# Allegro board AVRUSB500.brd
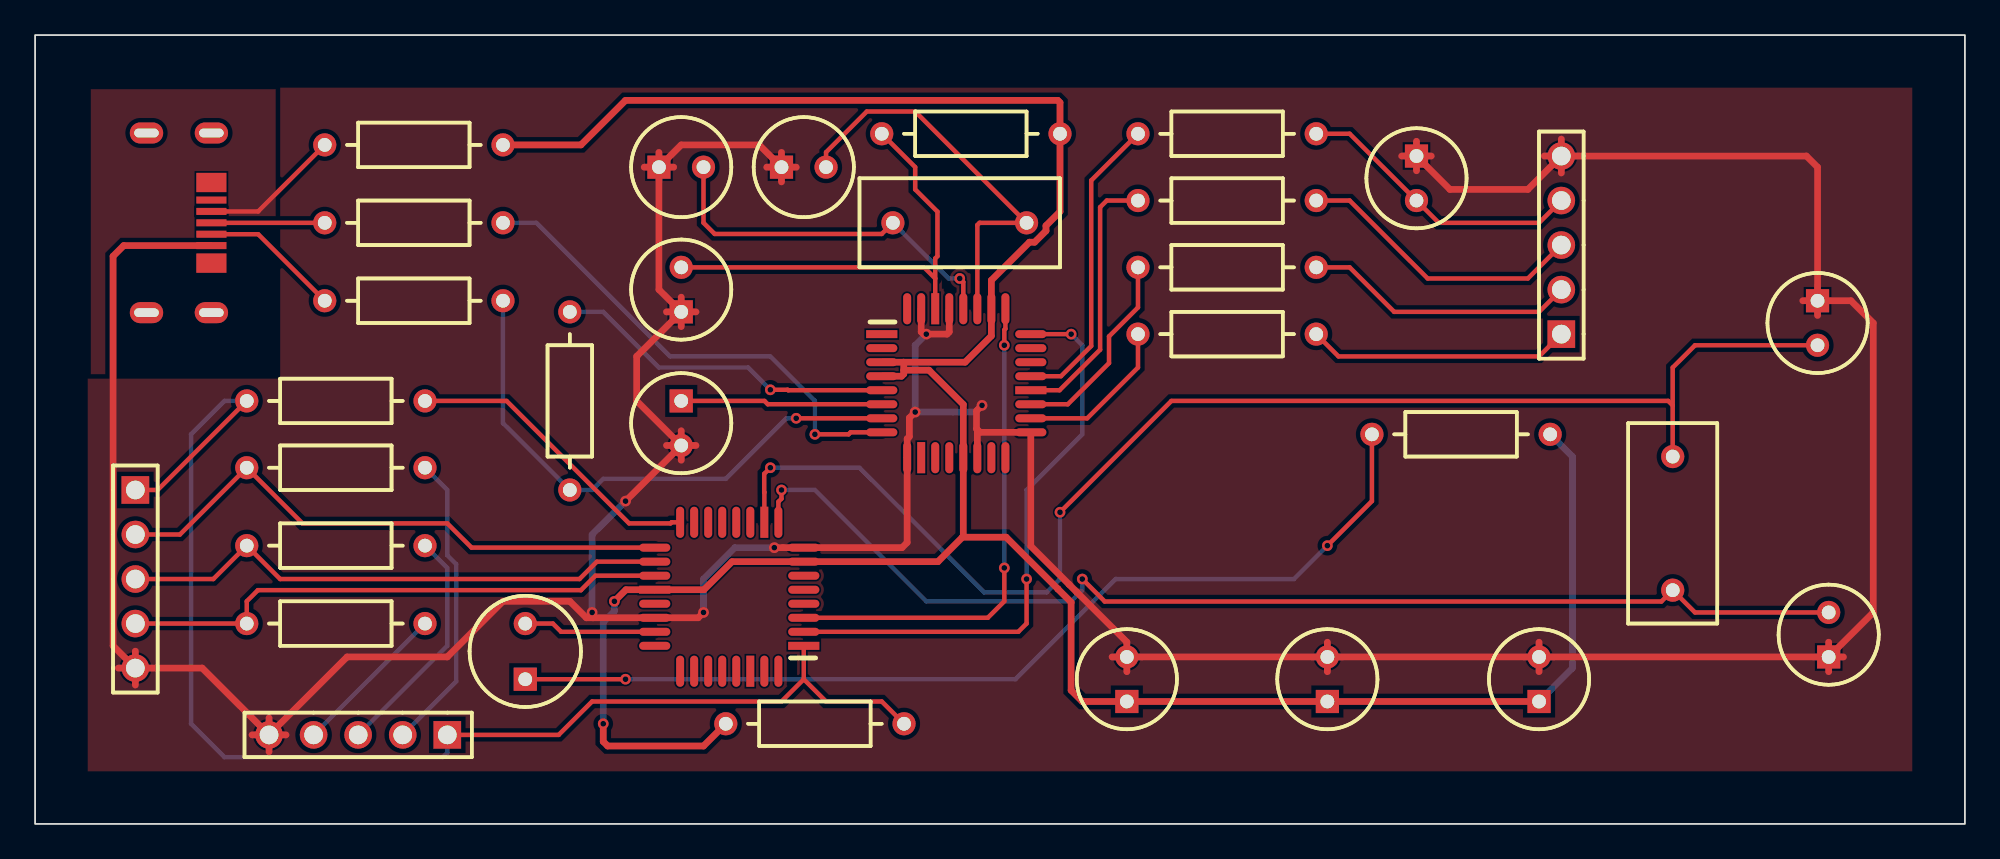
[diagram p0: board, top side]
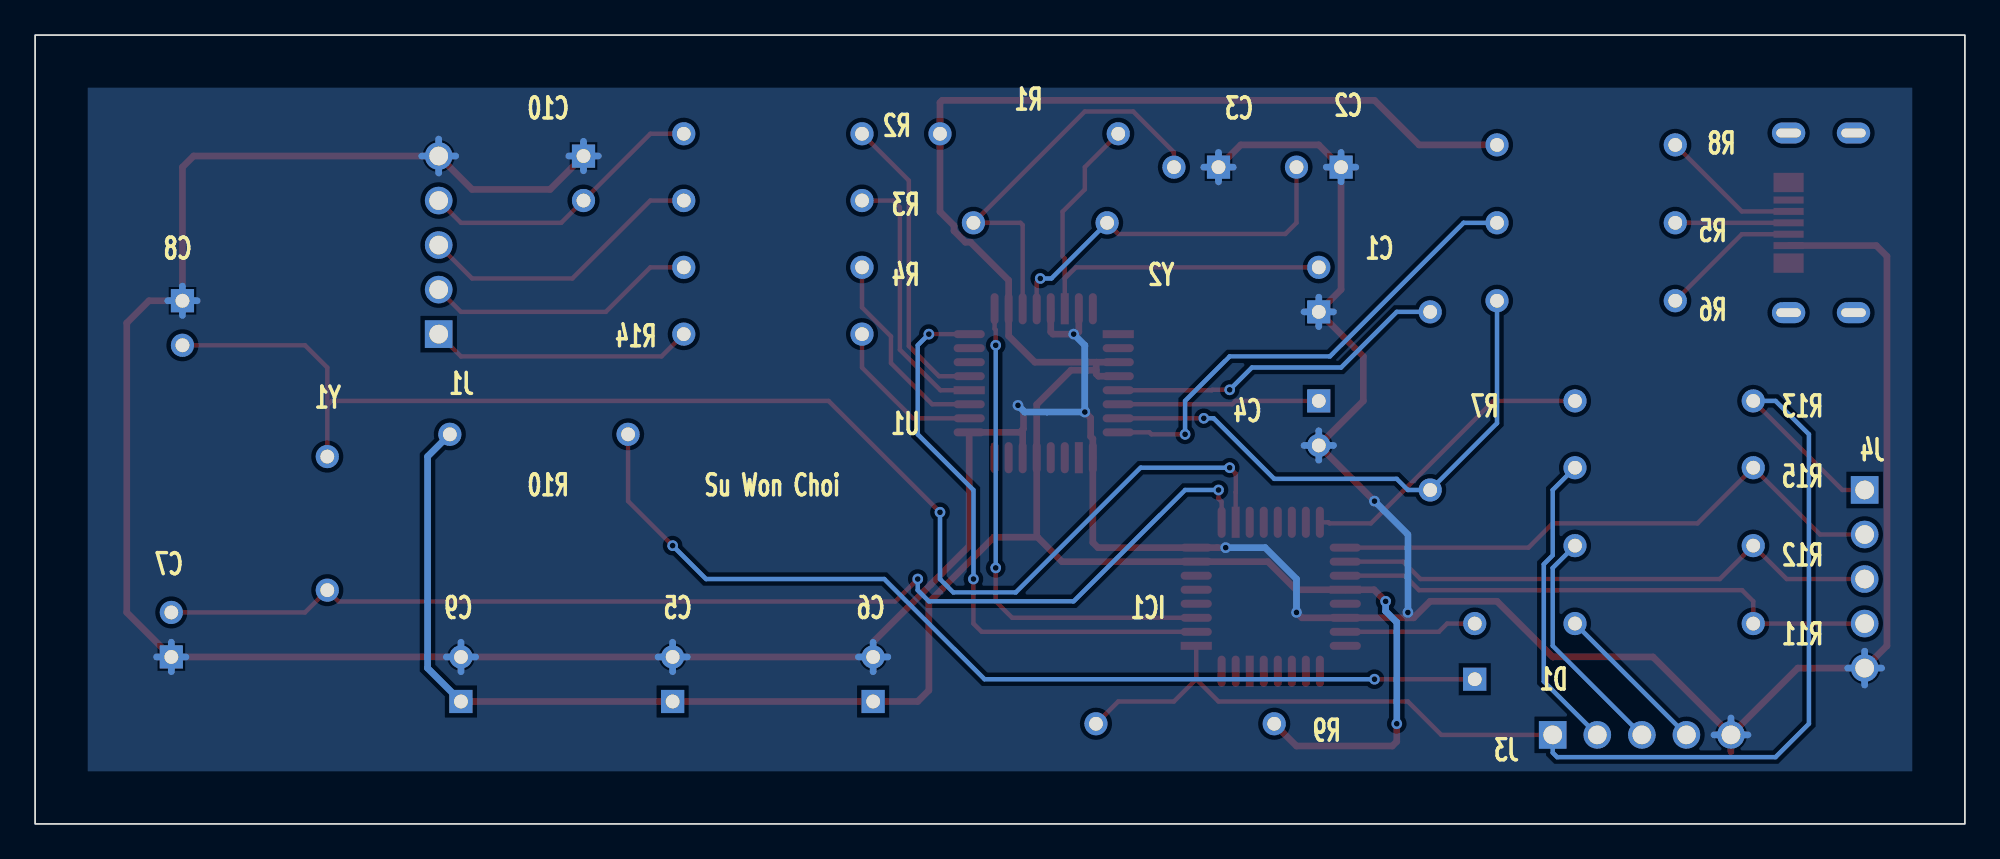
[diagram p1: board, bottom side, seen from below]

Outline 110 x 45 mm; copper layers: TOP, BOTTOM. Coordinates in mm from the lower left corner of the outline.
Outline path: rectangle 0,0 110,45

## Design rules (mm)
net group POWERNETS: nets GND VCC

## Placement (name value [footprint] x y rotation side)
C1  47nF  [CPCYL1D225LS100031]  36.83 29.21 90 top
C2  27pF  [CPCYL1D225LS100031]  35.56 37.47 0 top
C3  27pF  [CPCYL1D225LS100031]  42.54 37.47 0 top
C4  47nF  [CPCYL1D225LS100031]  36.83 24.13 270 top
C5  100nF  [CPCYL1D225LS100031]  73.66 6.99 90 top
C6  1uF  [CPCYL1D225LS100031]  62.23 6.99 90 top
C7  100nF  [CPCYL1D225LS100031]  102.23 9.53 90 top
C8  100nF  [CPCYL1D225LS100031]  101.6 29.84 270 top
C9  100nF  [CPCYL1D225LS100031]  85.72 6.99 90 top
C10  22nF  [CPCYL1D225LS100031]  78.74 38.1 270 top
D1  LED  [CYLD250LS125031]  27.94 8.25 90 top
IC1  ATmega8  [QUAD80M32WG900]  43.81 10.16 90 top
J1  bbpg_Bitbang  [BLKCON100VHTM1SQSW1005]  87 27.94 90 top
J2  USBA  [MICRO_USB]  6.35 34.29 270 top
J3  avrusb500_out  [BLKCON100VHTM1SQSW1005]  23.5 5.08 180 top
J4  firmware_in  [BLKCON100VHTM1SQSW1005]  5.71 19.05 270 top
NOREF  -  []  110 0 90 top
NOREF#2  -  []  0 45 0 top
R1  470  [AX400X100031]  48.26 39.37 0 top
R2  220  [AX400X100031]  62.86 39.37 0 top
R3  220  [AX400X100031]  62.86 35.56 0 top
R4  220  [AX400X100031]  62.86 31.75 0 top
R5  27  [AX400X100031]  16.51 34.29 0 top
R6  27  [AX400X100031]  16.51 29.84 0 top
R7  1.5k  [AX400X100031]  30.48 19.05 90 top
R8  2.2  [AX400X100031]  16.51 38.73 0 top
R9  10k  [AX400X100031]  39.37 5.72 0 top
R10  470  [AX400X100031]  76.2 22.22 0 top
R11  1k  [AX400X100031]  12.06 11.43 0 top
R12  220  [AX400X100031]  12.06 15.88 0 top
R13  1k  [AX400X100031]  12.06 20.32 0 top
R14  220  [AX400X100031]  62.86 27.94 0 top
R15  220  [AX400X100031]  22.22 24.13 180 top
U1  FT232BM  [QUAD80M32WG900]  48.26 27.94 270 top
Y1  3.6864Mhz  [RAD450X200LS300031]  93.34 20.96 270 top
Y2  6Mhz  [RAD450X200LS300031]  48.89 34.29 0 top

## Library data of the parts
C1-C5 C7-C10 = CAPACITOR NON-POL: alternate symbols: (SMDCAP)
C6 = CAPACITOR POL: alternate symbols: (SMDCAP)
D1 = LED
IC1 = ATmega8-DIL28_1
J1 J3 J4 = CON5
J2 = CON4_7
R1-R15 = R: alternate symbols: (SMDRES)
U1 = FT232BM_2: alternate symbols: (JEDECMS026)
Y1 Y2 = ZTA

## Footprints (pads in the part's own frame, mm; a bottom-side part is the same pattern mirrored in y, then rotated)
AX400X100031
  round 1.321 hole 0.787: 1(0,0) 2(10.16,0)
BLKCON100VHTM1SQSW1005
  rect 1.575x1.575 hole 1.067: 1(0,0)
  round 1.575 hole 1.067: 2(2.54,0) 3(5.08,0) 4(7.62,0) 5(10.16,0)
CPCYL1D225LS100031
  rect 1.321x1.321 hole 0.787: 1(0,0)
  round 1.321 hole 0.787: 2(2.54,0)
CYLD250LS125031
  rect 1.321x1.321 hole 0.787: 1(0,0)
  round 1.321 hole 0.787: 2(3.175,0)
MICRO_USB
  oval 1.2x1.9 hole 0.5x1.4: (-5.125,3.7) (-5.125,0) (5.125,3.7) (5.125,0)
  rect 1.1x1.72 smd: (-2.3,3.7) (2.3,3.7)
  rect 0.4x1.72 smd: 1(1.3,3.7) 2(0.65,3.7) 3(0,3.7) 4(-0.65,3.7) 5(-1.3,3.7)
QUAD80M32WG900
  rect 0.457x1.778 smd: 1(0,0) 20(3.2,8.496)
  oval 0.457x1.778 smd: 2(0.8,0) 3(1.6,0) 4(2.4,0) 5(3.2,0) 6(4,0) 7(4.801,0) 8(5.601,0) 17(5.601,8.496) 18(4.801,8.496) 19(4,8.496) 21(2.4,8.496) 22(1.6,8.496) 23(0.8,8.496) 24(0,8.496)
  oval 1.778x0.457 smd: 9(7.048,1.448) 11(7.048,3.048) 12(7.048,3.848) 13(7.048,4.648) 14(7.048,5.448) 15(7.048,6.248) 16(7.048,7.048) 25(-1.448,7.048) 26(-1.448,6.248) 27(-1.448,5.448) 28(-1.448,4.648) 29(-1.448,3.848) 31(-1.448,2.248) 32(-1.448,1.448)
  rect 1.778x0.457 smd: 10(7.048,2.248) 30(-1.448,3.048)
RAD450X200LS300031
  round 1.321 hole 0.787: 1(0,0) 2(7.62,0)

## Nets
+5V: J2.4 R8.1
GND: C1.1 C2.1 C3.1 C4.2 C5.2 C6.2 C7.1 C8.1 C9.2 C10.1 IC1.8(GND) IC1.22(AGND) J1.5 J2.1 J3.5 J4.5 U1.9(GND) U1.14(PWRCTL) U1.17(GND1) U1.29(AGND) U1.31(TEST)
VCC: C5.1 C6.1 C9.1 IC1.7(VCC) IC1.20(AVCC) R1.2 R8.2 R9.1 R10.2 U1.3(VCC) U1.4(RESET#) U1.13(VCC-IO) U1.26(VCC1)
BMISO: J1.3 R3.2
BMOSI: J1.2 R4.2
BRESET: J1.1 R14.2
BSCK: C10.2 J1.4 R2.2
D+: J2.2 R6.1
D-: J2.3 R5.1
F_MISO: IC1.18((MISO) PB4) J4.3 R12.1
F_MOSI: IC1.17((OC2/MOSI) PB3) J4.2 R13.1
F_SCK: IC1.19((SCK) PB5) J4.4 R11.1
MISO: J3.3 R12.2
MOSI: J3.2 R13.2
RESET: IC1.1(PC6 (R\E\S\E\T\)) J3.1 J4.1 R9.2 R15.2
RXD: IC1.2(PD0 (RXD)) U1.24(RXD)
SCK: J3.4 R11.2
TXD: IC1.3(PD1 (TXD)) U1.25(TXD)
N02483: R6.2 R7.1 U1.7(USBDP)
N02615: R5.2 U1.8(USBDM)
N03527: C4.1 U1.6(3V3OUT)
N06839: R2.1 U1.21(DTR#)
N06967: R3.1 U1.20(DSR#)
N07033: R4.1 U1.19(DCD#)
N07247: R14.1 U1.18(RI#)
N11951: R7.2 U1.5(RSTOUT#)
N15182: C7.2 IC1.9(PB6 (XT1/TOSC1)) Y1.2
N15289: C8.2 IC1.10(PB7 (XT2/TOSC2)) Y1.1
N19734: D1.2(CATHODE) IC1.23((ADC0) PC0)
N20572: D1.1(ANODE) R10.1
N22544: IC1.16((SS/OC1B) PB2) R15.1
N41098: C3.2 U1.27(XTIN) Y2.2
N41106: C2.2 U1.28(XTOUT) Y2.1
N49165: C1.2 R1.1 U1.30(AVCC)

Pads without a net: IC1 4 5 6 11 12 13 14 15 21 24 25 26 27 28 29 30 31 32; J2 5; U1 1 2 10 11 12 15 16 22 23 32

## Via types
v1: diameter 0.61, hole 0.33, TOP to BOTTOM, 23 vias

## Routing (per net, layer and track width the routed paths; a pad name or vN(x,y) marks a point on that pad's centre or on a via; arc(x,y) is an arc through that point)
+5V: length 8
  TOP w0.254: J2.4 12.71,34.94 R8.1
GND: length 337.5
  TOP w0.381: C10.1 79.58,38.1 ; C10.1 78.74,37.26 ; C10.1 78.74,38.94 ; C10.1 77.9,38.1 ; 4.75,8.89 J4.5 ; J4.5 5.71,9.86 ; J4.5 5.71,7.92 ; 85.72,10.36 C9.2 85.72,8.69 ; C2.1 35.56,38.3 ; C2.1 36.4,37.47 ; C2.1 34.72,37.47 ; 35.99,29.21 C1.1 ; C1.1 37.67,29.21 ; C1.1 36.83,30.05 ; C1.1 36.83,28.37 ; C7.1 102.23,10.36 ; C7.1 102.23,8.69 ; C7.1 103.07,9.53 ; J3.5 14.3,5.08 ; J3.5 13.33,6.05 ; J3.5 12.37,5.08 ; J3.5 13.33,4.11 ; 36.83,20.75 C4.2 ; C4.2 35.99,21.59 ; C4.2 37.67,21.59 ; C4.2 36.83,22.43 ; 62.23,8.69 C6.2 61.39,9.53 ; C3.1 43.38,37.47 ; C3.1 42.54,38.3 ; C3.1 41.71,37.47 ; C3.1 42.54,36.63 ; 101.6,29.01 C8.1 100.76,29.84 ; 86.03,38.1 J1.5 ; J1.5 87,39.07 ; J1.5 87,37.13 ; 73.66,10.36 C5.2 73.66,8.69
  TOP w0.382: C3.1 41.27,38.73 36.83,38.73 C2.1 35.56,30.48 C1.1 34.29,26.67 34.29,24.13 C4.2 v1(33.65,18.41) ; v1(42.14,15.76) 42.63,15.76 42.63,15.76 IC1.8 49.42,15.76 49.71,16.05 U1.9 49.71,21.97 49.83,22.1 49.83,23.16 v1(50.16,23.49) ; 53.71,22.49 53.66,22.54 53.66,23.56 v1(53.97,23.88) ; 53.71,22.49 U1.14 ; 53.71,22.49 53.86,22.34 U1.17 56.76,15.85 58.94,13.67 58.94,13.66 59.38,13.22 59.39,13.22 62.23,10.38 C6.2 C5.2 C9.2 C7.1 104.77,12.06 104.77,28.58 103.5,29.84 C8.1 101.6,37.47 100.96,38.1 J1.5 85.09,36.2 80.64,36.2 C10.1 ; U1.29 52.11,28.07 51.98,27.94 v1(50.8,27.94) 50.63,27.94 50.51,28.07 U1.31 ; 31.8,11.76 31.42,11.76 30.48,12.7 26.67,12.7 23.5,9.53 17.78,9.53 J3.5 9.52,8.89 J4.5 4.44,10.16 4.44,32.39 5.05,32.99 J2.1 ; 31.8,11.76 IC1.22 37.79,11.76 v1(38.1,12.06) ; 31.8,11.76 31.75,11.81 v1(31.75,12.06)
  BOTTOM w0.381: C8.1 101.6,30.68 ; C8.1 102.44,29.84 ; C8.1 100.76,29.84 ; C8.1 101.6,29.01 ; C2.1 36.4,37.47 ; C2.1 35.56,38.3 ; C2.1 35.56,36.63 ; C2.1 34.72,37.47 ; J3.5 13.33,6.05 ; J3.5 12.37,5.08 ; J3.5 14.3,5.08 ; J4.5 6.68,8.89 ; J4.5 4.75,8.89 ; J4.5 5.71,9.86 ; J4.5 5.71,7.92 ; 102.23,8.69 C7.1 ; C7.1 102.23,10.36 ; C7.1 103.07,9.53 ; C7.1 101.4,9.53 ; C1.1 37.67,29.21 ; C1.1 35.99,29.21 ; C1.1 36.83,30.05 ; C1.1 36.83,28.37 ; J1.5 87,39.07 ; J1.5 87.96,38.1 ; J1.5 87,37.13 ; J1.5 86.03,38.1 ; C9.2 86.56,9.53 ; C9.2 85.72,8.69 ; C9.2 85.72,10.36 ; C9.2 84.89,9.53 ; 73.66,8.69 C5.2 ; C5.2 73.66,10.36 ; C5.2 74.5,9.53 ; C5.2 72.82,9.53 ; C4.2 37.67,21.59 ; C4.2 36.83,20.75 ; C4.2 36.83,22.43 ; C4.2 35.99,21.59 ; C6.2 63.07,9.53 ; C6.2 61.39,9.53 ; C6.2 62.23,10.36 ; C6.2 62.23,8.69 ; 78.74,37.26 C10.1 ; C10.1 77.9,38.1 ; C10.1 78.74,38.94 ; C10.1 79.58,38.1 ; 41.71,37.47 C3.1 ; C3.1 42.54,38.3 ; C3.1 42.54,36.63 ; C3.1 43.38,37.47
  BOTTOM w0.382: v1(53.97,23.88) 53.59,23.49 v1(50.16,23.49) 50.16,27.3 v1(50.8,27.94) ; v1(38.1,12.06) 38.1,13.97 39.89,15.76 v1(42.14,15.76) ; v1(31.75,12.06) 31.75,16.51 v1(33.65,18.41)
VCC: length 162.1
  TOP w0.382: 49.5,26.34 U1.3 ; 49.5,26.34 49.51,26.32 49.51,25.88 ; 49.5,26.34 53.01,26.34 54.51,27.84 U1.26 54.51,31.01 56.68,33.18 56.97,33.18 57.62,33.83 57.62,34.13 58.42,34.92 R1.2 58.42,41.15 58.29,41.28 33.65,41.28 31.11,38.73 R8.2 ; 49.51,25.88 50.95,25.88 52.91,23.93 U1.13 52.91,16.41 52.86,16.36 ; 49.51,25.88 49.51,25.67 49.39,25.54 U1.4 ; 52.86,16.36 51.46,14.96 IC1.7 39.73,14.96 38.12,13.36 IC1.20 33.68,13.36 v1(33.02,12.7) ; 52.86,16.36 55.35,16.36 58.3,13.4 58.3,13.4 59.06,12.64 59.06,7.62 59.69,6.99 C6.1 C5.1 C9.1 ; R9.1 38.1,4.44 32.64,4.44 32.38,4.7 v1(32.38,5.72)
  BOTTOM w0.382: v1(33.02,12.7) 33.02,12.14 32.38,11.51 v1(32.38,5.72) ; R10.2 87.63,20.96 87.63,8.89 C9.1
BMISO: length 16.6
  TOP w0.254: J1.3 85.09,31.11 79.38,31.11 74.93,35.56 R3.2
BMOSI: length 15.5
  TOP w0.254: J1.2 85.72,29.21 77.47,29.21 74.93,31.75 R4.2
BRESET: length 15
  TOP w0.254: J1.1 85.72,26.67 74.29,26.67 R14.2
BSCK: length 16.6
  TOP w0.254: R2.2 74.93,39.37 C10.2 80.01,34.29 85.72,34.29 J1.4
D+: length 8
  TOP w0.254: R6.1 12.71,33.64 J2.2
D-: length 6.5
  TOP w0.254: J2.3 R5.1
F_MISO: length 31.6
  TOP w0.254: IC1.18 32.02,14.96 31.03,13.97 13.97,13.97 R12.1 10.16,13.97 J4.3
F_MOSI: length 33.1
  TOP w0.254: IC1.17 24.88,15.76 23.5,17.15 15.24,17.15 R13.1 8.25,16.51 J4.2
F_SCK: length 31.5
  TOP w0.254: J4.4 R11.1 12.06,12.7 12.7,13.34 31.11,13.34 31.94,14.16 IC1.19
MISO: length 13.4
  BOTTOM w0.254: 22.22,15.88 23.5,14.6 23.5,10.16 J3.3
MOSI: length 17.2
  BOTTOM w0.254: J3.2 24,8.13 24,14.82 23.5,15.32 23.5,19.05 22.22,20.32
RESET: length 75.8
  TOP w0.254: 43.81,8.25 IC1.1 ; 43.81,8.25 42.54,6.99 31.75,6.99 29.84,5.08 J3.1 ; 43.81,8.25 45.08,6.99 48.26,6.99 R9.2 ; J4.1 6.98,19.05 R15.2
  BOTTOM w0.254: J3.1 23.5,4.06 23.24,3.81 10.79,3.81 8.89,5.72 8.89,22.22 10.79,24.13 R15.2
RXD: length 33.3
  TOP w0.254: IC1.2 56.04,10.96 56.51,11.43 v1(56.51,13.97) ; v1(59.06,27.94) U1.24
  BOTTOM w0.254: v1(59.06,27.94) 59.69,27.3 59.69,22.22 56.51,19.05 v1(56.51,13.97)
SCK: length 9
  BOTTOM w0.254: 22.22,11.43 J3.4
TXD: length 28.5
  TOP w0.254: U1.25 55.31,28.24 55.25,28.18 v1(55.25,27.3) ; v1(55.25,14.6) 55.25,12.7 54.31,11.76 IC1.3
  BOTTOM w0.254: v1(55.25,14.6) v1(55.25,27.3)
N02483: length 31.8
  TOP w0.254: v1(43.38,23.14) 48.26,23.14
  BOTTOM w0.254: R6.2 26.67,22.86 R7.1 31.75,19.05 32.38,19.69 39.37,19.69 42.82,23.14 v1(43.38,23.14)
N02615: length 27.8
  TOP w0.254: v1(44.45,22.22) 46.37,22.22 46.48,22.34 U1.8
  BOTTOM w0.254: R5.2 28.57,34.29 36.19,26.67 41.91,26.67 44.45,24.13 v1(44.45,22.22)
N03527: length 11.5
  TOP w0.254: C4.1 41.57,24.13 41.76,23.94 U1.6
N06839: length 17.4
  TOP w0.254: R2.1 60.2,36.7 60.2,27.26 58.48,25.54 U1.21
N06967: length 15.4
  TOP w0.254: R3.1 61.09,35.56 60.71,35.18 60.71,27.05 58.39,24.74 U1.20
N07033: length 11.6
  TOP w0.254: R4.1 62.86,29.46 61.21,27.81 61.21,26.29 58.86,23.94 U1.19
N07247: length 9.2
  TOP w0.254: 56.76,23.14 59.97,23.14 62.86,26.03 R14.1
N11951: length 19.6
  TOP w0.254: U1.5 42.93,24.74 42.9,24.77 v1(41.91,24.77)
  BOTTOM w0.254: v1(41.91,24.77) 40.64,26.03 35.56,26.03 32.38,29.21 R7.2
N15182: length 66.5
  TOP w0.254: IC1.9 42.37,18.38 42.54,18.55 v1(42.54,19.05) ; v1(59.69,13.97) 60.97,12.69 92.7,12.69 Y1.2 94.61,12.06 C7.2
  BOTTOM w0.254: v1(59.69,13.97) 59.69,13.34 59.06,12.7 50.8,12.7 44.45,19.05 v1(42.54,19.05)
N15289: length 78.4
  TOP w0.254: 93.34,23.88 Y1.1 ; 93.34,23.88 93.09,24.13 64.77,24.13 v1(58.42,17.78) ; 93.34,23.88 93.34,26.03 94.61,27.3 C8.2 ; v1(41.91,20.32) 41.56,19.97 41.56,18.92 41.57,18.92 IC1.10
  BOTTOM w0.254: v1(58.42,17.78) 58.42,13.97 57.66,13.21 54.1,13.21 46.99,20.32 v1(41.91,20.32)
N19734: length 7.6
  TOP w0.254: IC1.23 29.98,10.96 29.51,11.43 D1.2
N20572: length 56.3
  TOP w0.254: R10.1 76.2,18.41 v1(73.66,15.88) ; D1.1 v1(33.65,8.25)
  BOTTOM w0.254: v1(73.66,15.88) 71.75,13.97 61.59,13.97 55.88,8.25 v1(33.65,8.25)
N22544: length 17.5
  TOP w0.254: IC1.16 36.28,17.21 36.22,17.15 33.86,17.15 26.87,24.13 R15.1
N41098: length 23.5
  TOP w0.254: U1.27 53.71,34.16 53.83,34.29 Y2.2 50.16,40.64 47.41,40.64 45.08,38.32 C3.2
N41106: length 21.4
  TOP w0.254: U1.28 52.91,30.91 v1(52.7,31.11) ; C2.2 38.1,34.29 38.73,33.66 48.26,33.66 Y2.1
  BOTTOM w0.254: Y2.1 52.07,31.11 v1(52.7,31.11)
N49165: length 26.1
  TOP w0.254: 51.31,31.11 U1.30 ; 51.31,31.11 51.31,32.26 51.44,32.39 51.44,34.92 50.16,36.2 50.16,37.47 R1.1 ; 51.31,31.11 50.67,31.75 C1.2

## Copper pours and planes (outline as drawn; the poured copper is in the pictures)
+5V on TOP: 3.17,41.91 3.17,25.4 13.97,25.4 13.97,41.91 ; 1 cut-out
GND on TOP: 3,3 3,25.4 13.97,25.4 13.97,42 107,42 107,3 ; 7 cut-outs
GND on BOTTOM: 3,3 3,42 107,42 107,3 ; 3 cut-outs

## Text on the board
Ref Des/Silkscreen Bottom: Su Won Choi
DIMENSION: FIGURE | SIZE | 0.33 | 0.7869 | 1.0671 | 1.4x0.5001 | DRILL CHART: TOP to BOTTOM | ALL UNITS ARE IN MILLIMETERS | PLATED | QTY | 23 | 56 | 15 | 4
NCLEGEND-1-1: FIGURE | SIZE | 0.001 | DRILL CHART: TOP to TOP | ALL UNITS ARE IN MILLIMETERS | PLATED | QTY | 2
